# Altium PCB hud_v300.PcbDoc
Units mm, origin at the board's own origin, x right, y up, seen from the top; angles counter-clockwise.
Board outline 60 x 80 mm, 4 copper layers (Top Layer, Ground, Power, Bottom Layer), stack 1.57 mm thick; 82 components, 69 nets, 280 pads, 96 vias.
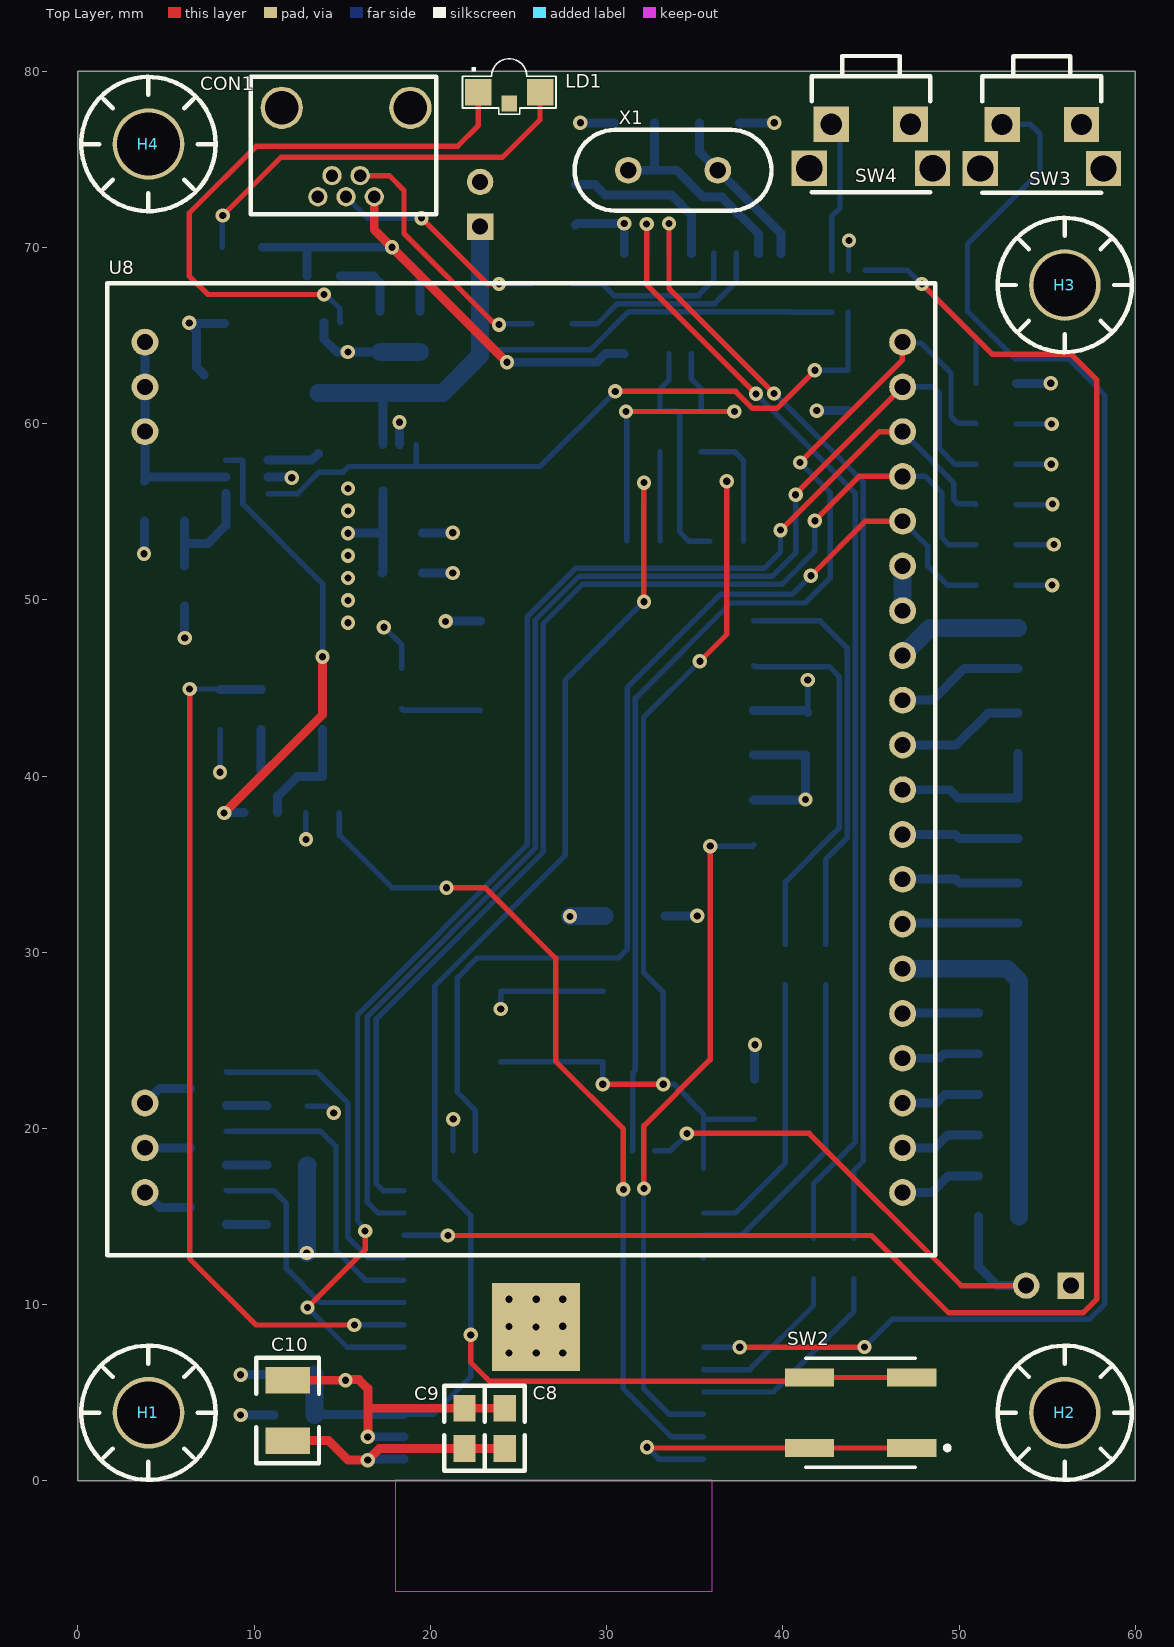
[diagram p0: Top Layer view]
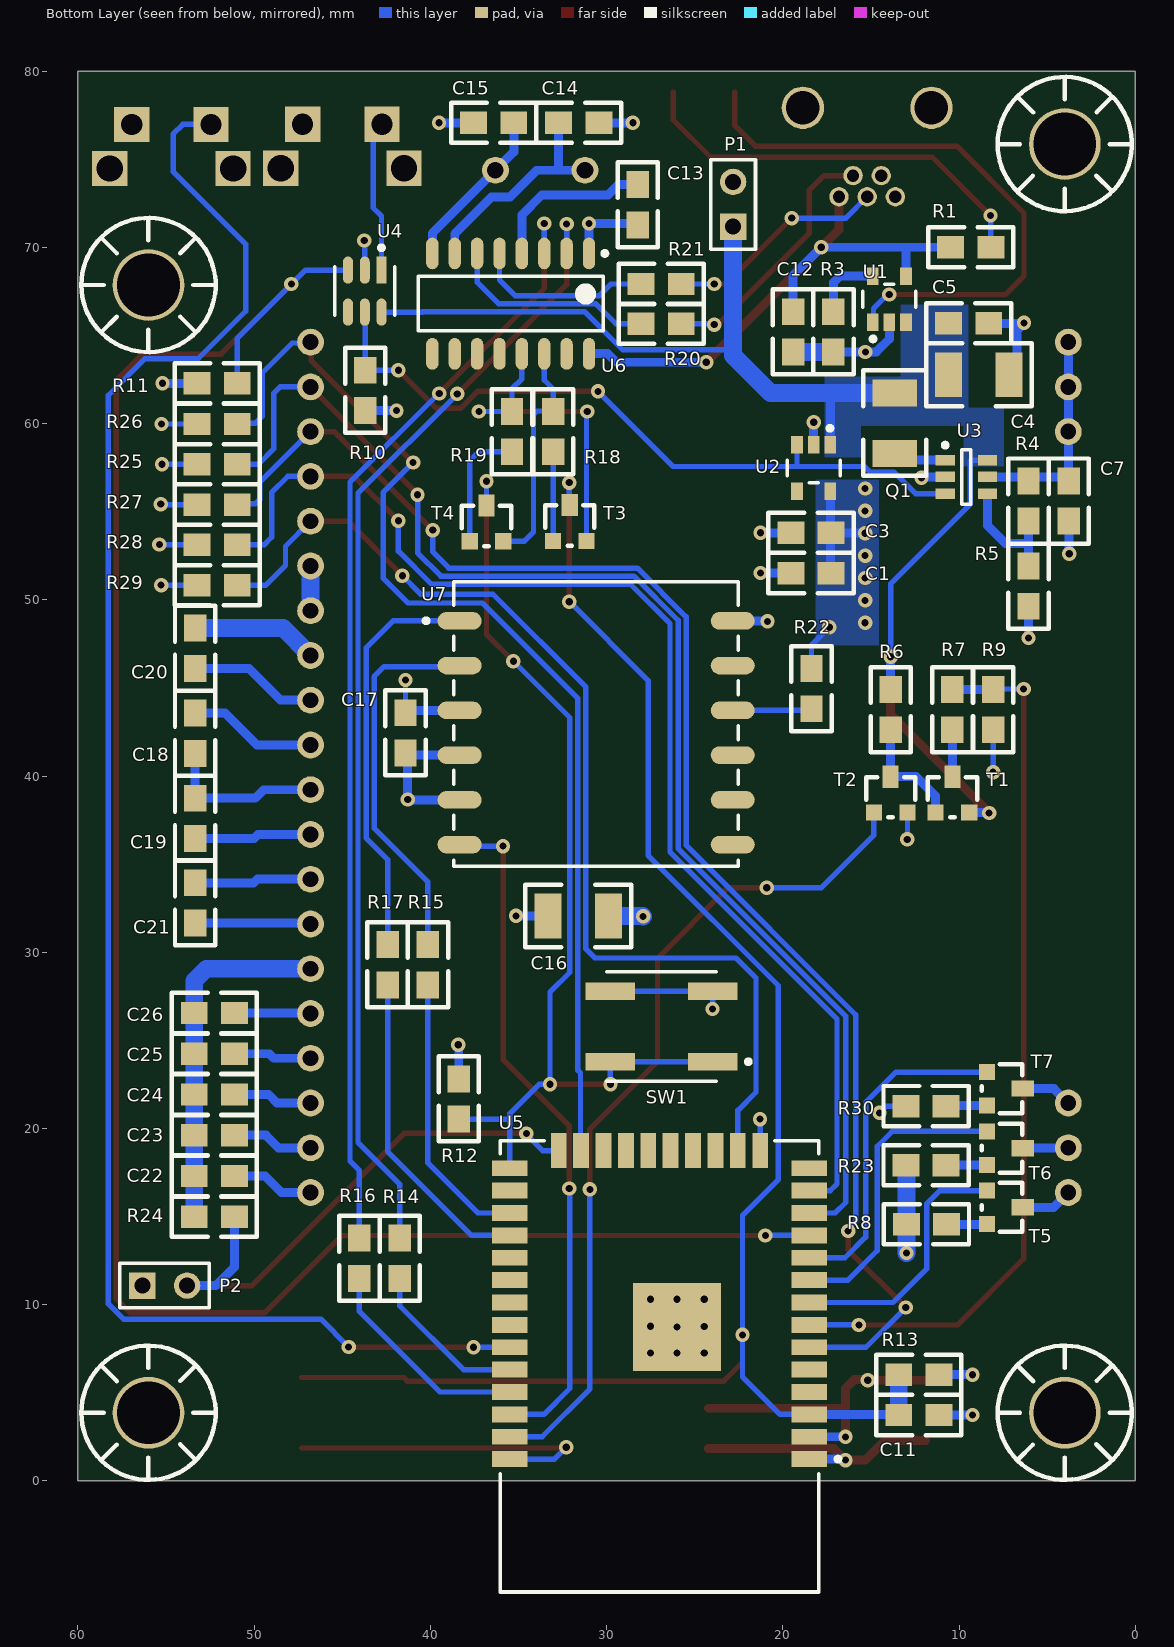
[diagram p1: Bottom Layer view, seen from below]
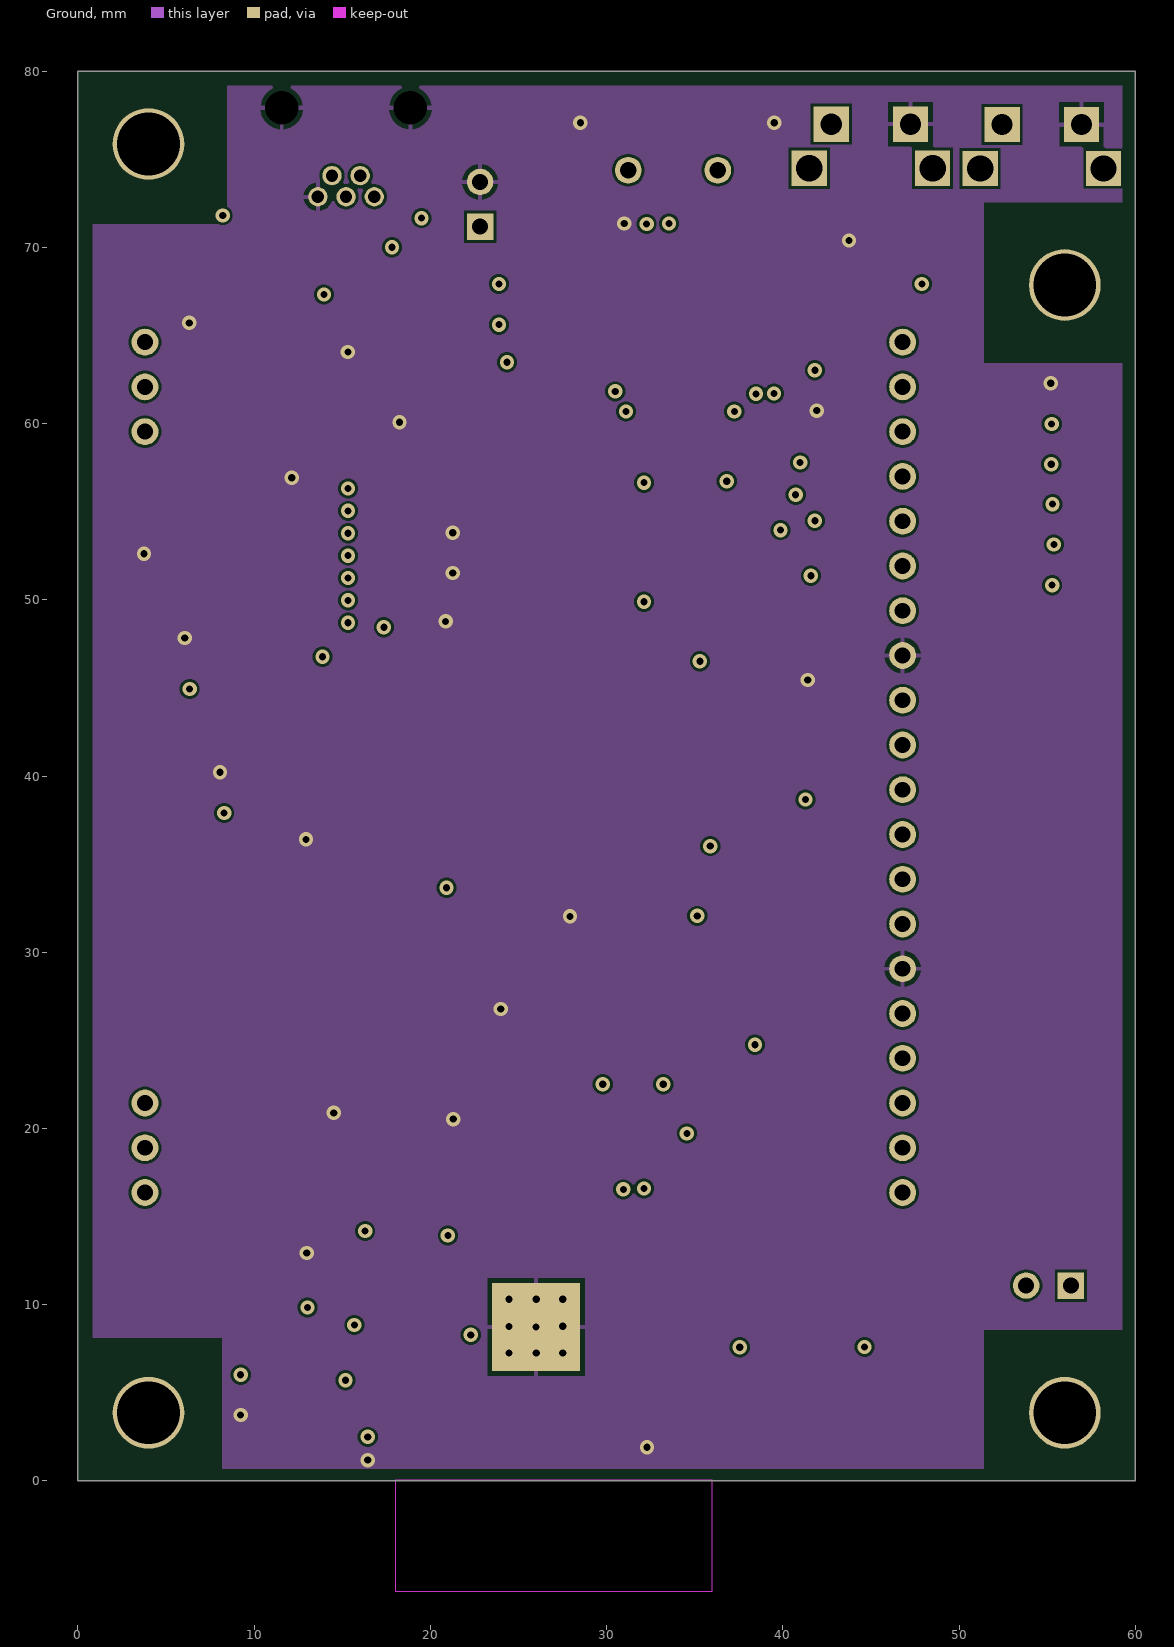
[diagram p2: Ground]
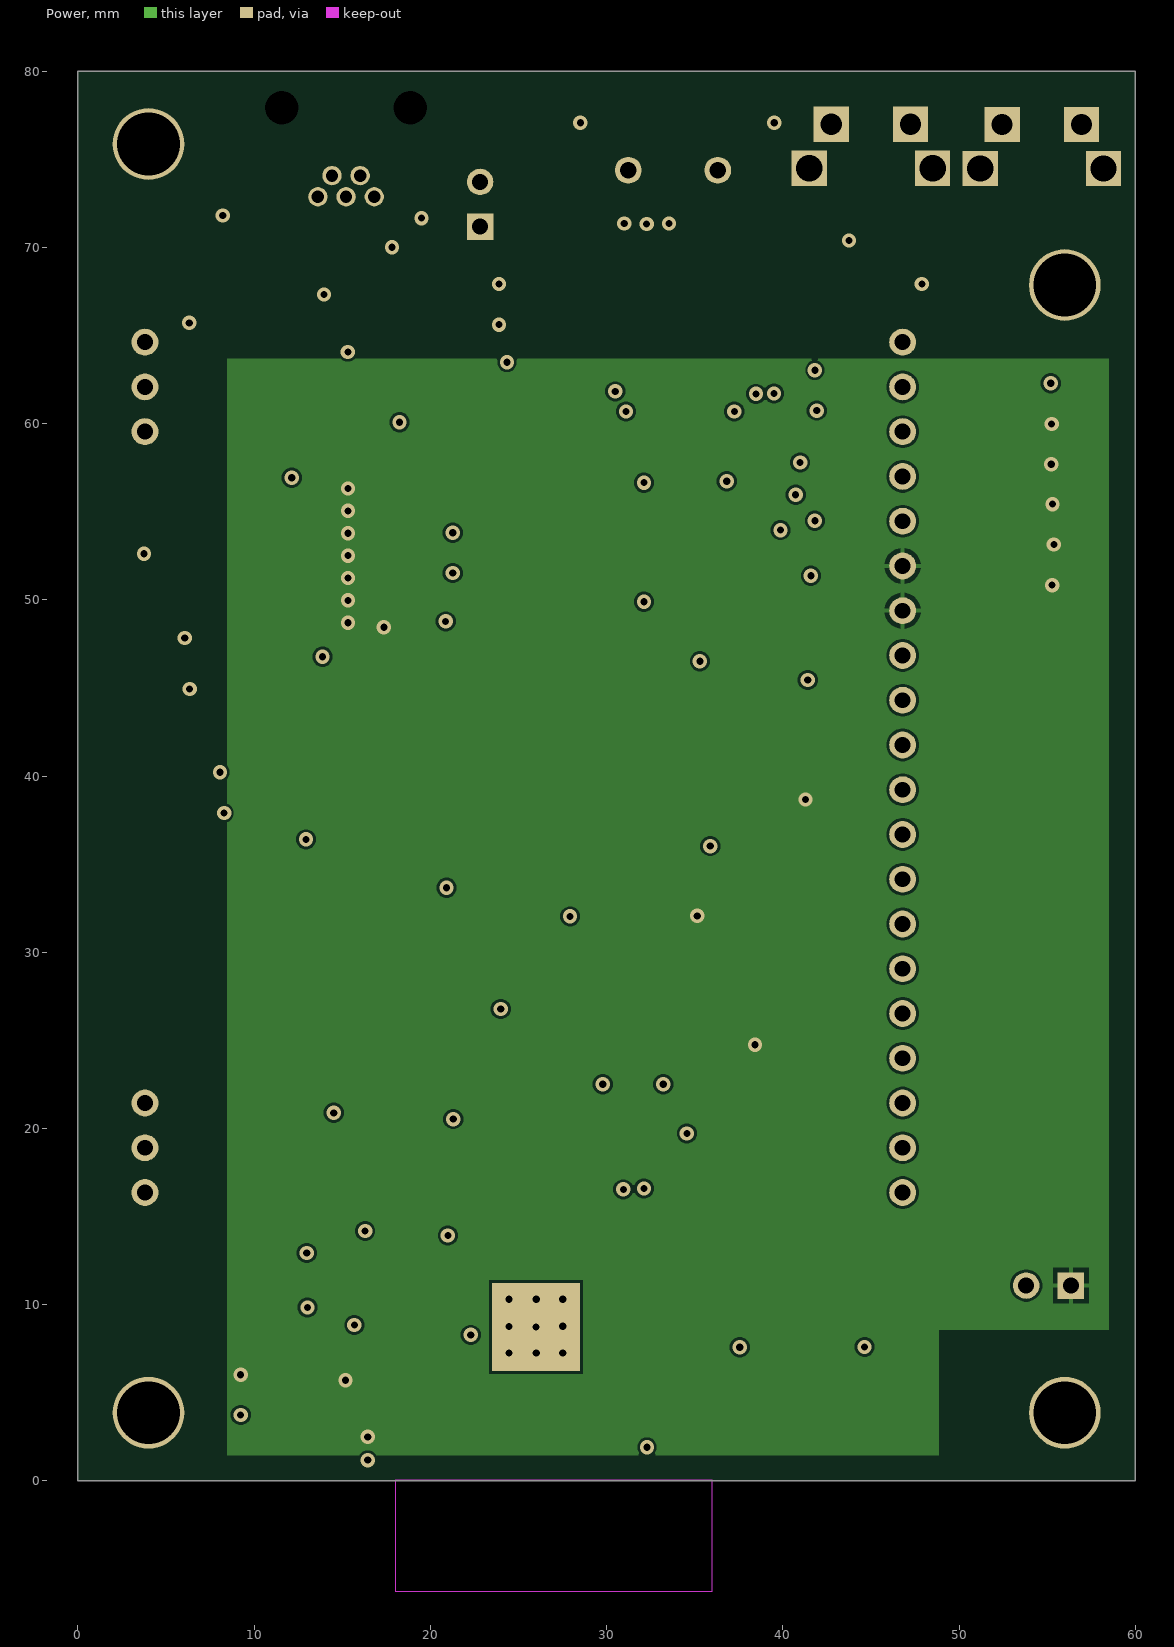
[diagram p3: Power]
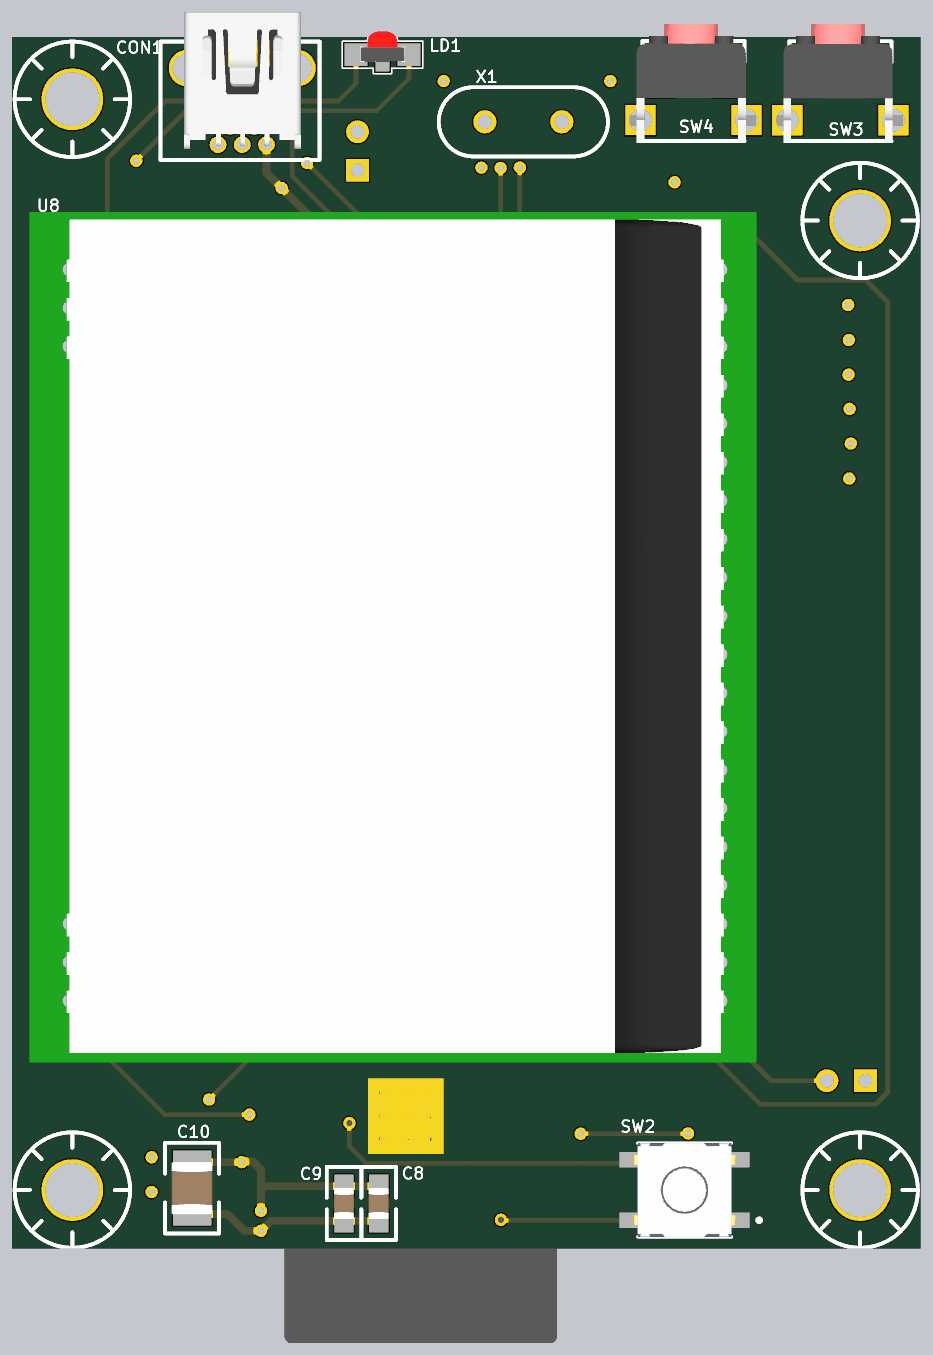
[diagram p4: 3D render of the assembled board from above, using the file's embedded part models]
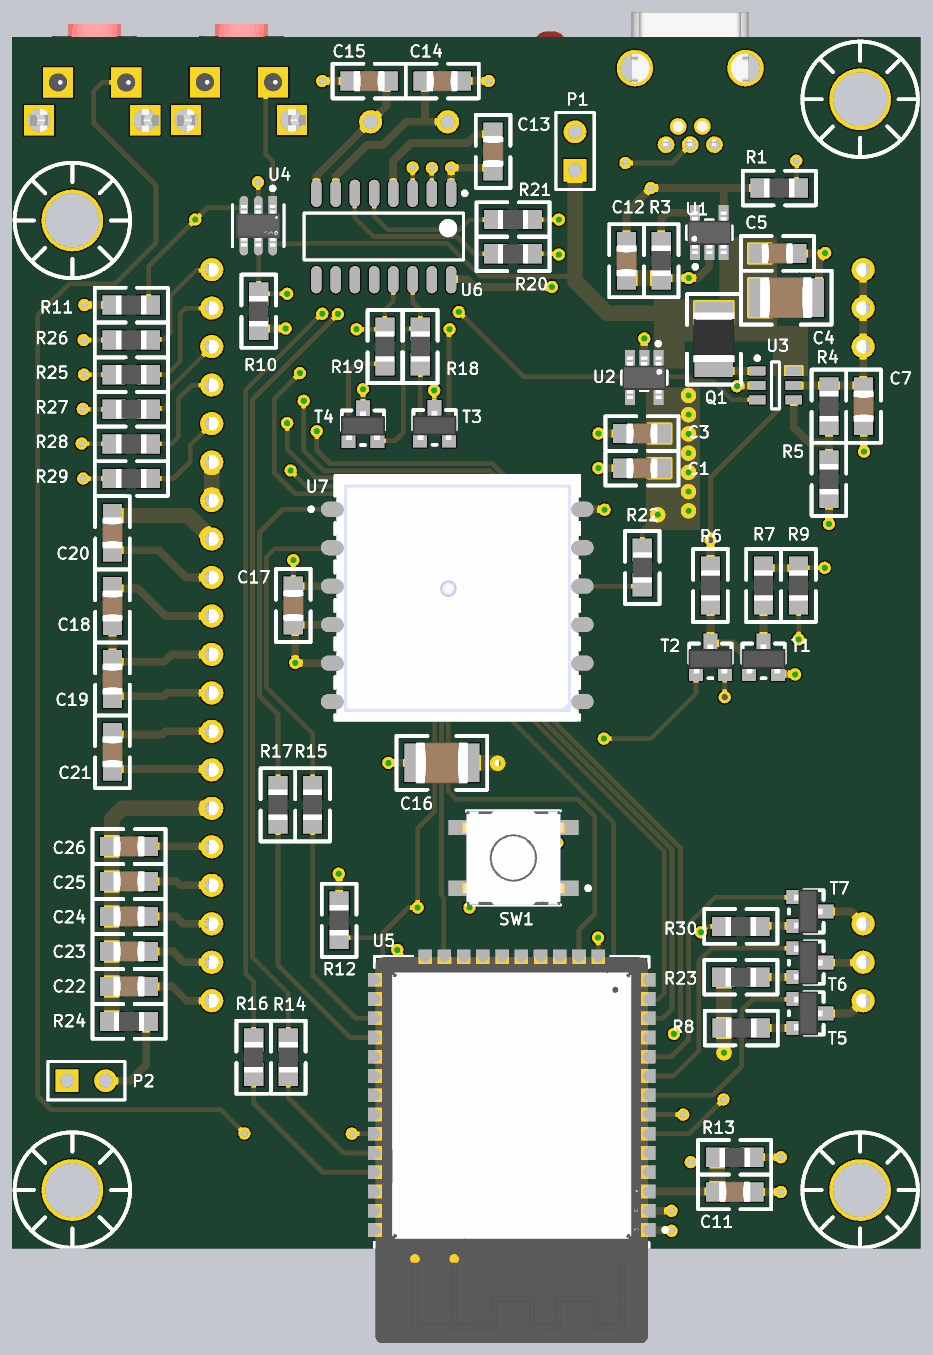
[diagram p5: 3D render of the assembled board from below, using the file's embedded part models]

## Layer stack, top to bottom
Top Solder: solder mask 0.0127, Solder Resist, Dk 3.8
Top Layer: signal copper 0.035
Dielectric 1: prepreg 0.2, 7628, Dk 4.6
Ground: signal copper 0.0175
Core: core 1.065, FR-4, Dk 4.5
Power: signal copper 0.0175
Dielectric 2: prepreg 0.2, 7628, Dk 4.6
Bottom Layer: signal copper 0.035
Bottom Solder: solder mask 0.0127, Solder Resist, Dk 3.8

## Board outline
0,0 60,0 60,80 0,80

## Design rules (kind name [scope] priority, off if disabled: settings)
Clearance [All] p1: gap=0.152 ignorepadtopadclearanceinfootprint=FALSE
PolygonConnect PolygonConnect_5 [All vs IsNamedPolygon('NONET_L02_P-001')] p1: thpad.connectstyle=Relief thpad.reliefconductorwidth=0.254 thpad.reliefentries=4 thpad.polygonreliefangle="90 Angle" thpad.airgapwidth=0.254 smdpad.connectstyle=Direct smdpad.reliefconductorwidth=0.254 smdpad.reliefentries=4 smdpad.polygonreliefangle="90 Angle" smdpad.airgapwidth=0.254 via.connectstyle=Direct via.reliefconductorwidth=0.254 via.reliefentries=4 via.polygonreliefangle="90 Angle" via.airgapwidth=0.254
PolygonConnect PolygonConnect_4 [All vs IsNamedPolygon('NONET_L02_P-001')] p2: thpad.connectstyle=Relief thpad.reliefconductorwidth=0.254 thpad.reliefentries=4 thpad.polygonreliefangle="90 Angle" thpad.airgapwidth=0.254 smdpad.connectstyle=Direct smdpad.reliefconductorwidth=0.254 smdpad.reliefentries=4 smdpad.polygonreliefangle="90 Angle" smdpad.airgapwidth=0.254 via.connectstyle=Relief via.reliefconductorwidth=0.254 via.reliefentries=4 via.polygonreliefangle="90 Angle" via.airgapwidth=0.254
PolygonConnect PolygonConnect_3 [All vs IsNamedPolygon('NONET_L02_P-001')] p3: thpad.connectstyle=Relief thpad.reliefconductorwidth=0.254 thpad.reliefentries=4 thpad.polygonreliefangle="90 Angle" thpad.airgapwidth=0.254 smdpad.connectstyle=Direct smdpad.reliefconductorwidth=0.254 smdpad.reliefentries=4 smdpad.polygonreliefangle="90 Angle" smdpad.airgapwidth=0.254 via.connectstyle=Relief via.reliefconductorwidth=0.254 via.reliefentries=4 via.polygonreliefangle="90 Angle" via.airgapwidth=0.254
PolygonConnect PolygonConnect_2 [All vs IsNamedPolygon('+VBAT_L04_P000')] p4: thpad.connectstyle=Relief thpad.reliefconductorwidth=0.254 thpad.reliefentries=4 thpad.polygonreliefangle="90 Angle" thpad.airgapwidth=0.254 smdpad.connectstyle=Direct smdpad.reliefconductorwidth=0.254 smdpad.reliefentries=4 smdpad.polygonreliefangle="90 Angle" smdpad.airgapwidth=0.254 via.connectstyle=Relief via.reliefconductorwidth=0.254 via.reliefentries=4 via.polygonreliefangle="90 Angle" via.airgapwidth=0.254
PolygonConnect PolygonConnect_1 [All vs IsNamedPolygon('+VBAT_L02_P000')] p5: thpad.connectstyle=Relief thpad.reliefconductorwidth=0.254 thpad.reliefentries=4 thpad.polygonreliefangle="90 Angle" thpad.airgapwidth=0.254 smdpad.connectstyle=Direct smdpad.reliefconductorwidth=0.254 smdpad.reliefentries=4 smdpad.polygonreliefangle="90 Angle" smdpad.airgapwidth=0.254 via.connectstyle=Relief via.reliefconductorwidth=0.254 via.reliefentries=4 via.polygonreliefangle="90 Angle" via.airgapwidth=0.254
PolygonConnect [All] p6: connectstyle=Relief reliefconductorwidth=0.254 reliefentries=4 polygonreliefangle="90 Angle" airgapwidth=0.254
RoomDefinition U_hud_v300_PWR [InComponentClass('U_hud_v300_PWR')] p1 off: confinementstyle=ConfineIn formatcopy=TRUE lockcomponents=FALSE outline 173.443,144.718 328.637,144.718 328.637,161.228 173.443,161.228
RoomDefinition hud_v300_MAIN [InComponentClass('hud_v300_MAIN')] p2 off: confinementstyle=ConfineIn formatcopy=TRUE lockcomponents=FALSE outline 173.443,14.924 209.13,14.924 209.13,25.719 173.443,25.719
RoomDefinition U_hud_v300_MU [InComponentClass('U_hud_v300_MU')] p3 off: confinementstyle=ConfineIn formatcopy=TRUE lockcomponents=FALSE outline 173.443,121.731 227.418,121.731 227.418,143.448 173.443,143.448
RoomDefinition U_hud_v300_MCU [InComponentClass('U_hud_v300_MCU')] p4 off: confinementstyle=ConfineIn formatcopy=TRUE lockcomponents=FALSE outline 173.443,90.997 287.616,90.997 287.616,120.334 173.443,120.334
RoomDefinition U_hud_v300_DISP [InComponentClass('U_hud_v300_DISP')] p5 off: confinementstyle=ConfineIn formatcopy=TRUE lockcomponents=FALSE outline 173.443,30.545 342.734,30.545 342.734,89.6 173.443,89.6
RoomDefinition U_hud_v300_CONN [InComponentClass('U_hud_v300_CONN')] p6 off: confinementstyle=ConfineIn formatcopy=TRUE lockcomponents=FALSE outline 173.443,11.749 289.648,11.749 289.648,29.275 173.443,29.275
RoutingVias [All] p1: holewidth=0.406 width=0.813 viastyle="Through Hole" minholewidth=0.406 minwidth=0.813 maxholewidth=0.406 maxwidth=0.813
SolderMaskExpansion [All] p1: expansion=0.102 istentingtop=FALSE
Width [All] p1: maxlimit=1.016 minlimit=0.254 preferedwidth=0.508 toplayer_minwidth=0.305 midlayer1_maxwidth=0.254 midlayer1_prefwidth=0.254 midlayer2_maxwidth=0.254 midlayer2_prefwidth=0.254 bottomlayer_minwidth=0.305 minimp=50.000000 maximp=50.000000 favimp=50.000000
30 further rules are at their usual default settings.

## Classes and differential pairs
component class hud_v300_MAIN: H1 H2 H3 H4
component class U_hud_v300_PWR: C1 C3 C4 C5 C7 LD1 Q1 R1 R3 R4 R5 R6 R7 R9 R10 R11 T1 T2 U1 U2 U3 U4
component class U_hud_v300_MU: C16 C17 P2 R22 R24 U7
component class U_hud_v300_MCU: C8 C9 C10 C11 R12 R13 R14 R15 R16 R17 R18 R19 SW1 SW2 T3 T4 U5
component class U_hud_v300_DISP: C18 C19 C20 C21 C22 C23 C24 C25 C26 R8 R23 R25 R26 R27 R28 R29 R30 T5 T6 T7 U8
component class U_hud_v300_CONN: C12 C13 C14 C15 CON1 P1 R20 R21 SW3 SW4 U6 X1

## Components (designator, comment, footprint, x,y, rotation, side; value= is the part's Value field where it differs from the comment)
C1 "47uF" 0805_C 18.401,51.525 r0 bottom
C3 "100nF" 0805_C 18.401,53.811 r180 bottom
C4 "10uF" 1210_C 8.876,62.905 r0 bottom
C5 "100nF" 0805_C 9.461,65.699 r0 bottom
C7 "100nF" 0805_C 3.771,55.615 r90 bottom
C8 "100nF" 0805_C 24.218,2.986 r90 top
C9 "100nF" 0805_C 21.932,2.986 r90 top
C10 "10uF" 1210_C 12.026,4.002 r90 top
C11 "100nF" 0805_C 12.28,3.748 r180 bottom
C12 "100nF" 0805_C 19.417,65.216 r90 bottom
C13 "100nF" 0805_C 28.231,72.43 r90 bottom
C14 "22pF" 0805_C 31.584,77.078 r0 bottom
C15 "22pF" 0805_C 36.41,77.078 r180 bottom
C16 "10uF" 1210_C 31.609,32.196 r0 bottom
C17 "100nF" 0805_C 41.414,42.458 r270 bottom
C18 "1uF" 0805_C 53.352,42.432 r90 bottom
C19 "1uF" 0805_C 53.352,37.606 r90 bottom
C20 "1uF" 0805_C 53.352,47.258 r270 bottom
C21 "1uF" 0805_C 53.352,32.806 r90 bottom
C22 "1uF" 0805_C 52.26,17.312 r180 bottom
C23 "1uF" 0805_C 52.26,19.623 r180 bottom
C24 "1uF" 0805_C 52.26,21.934 r180 bottom
C25 "1uF" 0805_C 52.26,24.246 r180 bottom
C26 "1uF" 0805_C 52.26,26.557 r180 bottom
CON1 "USB-MINI" USB-MINI 15.141,75.696 r180 top
H1 "HOLE" HOLE_140_160MIL 4,4 r0 top
H2 "HOLE" HOLE_140_160MIL 56,4 r0 top
H3 "HOLE" HOLE_140_160MIL 56,68 r0 top
H4 "HOLE" HOLE_140_160MIL 4,76 r0 top
LD1 "LED_RED" LED_SMD_90DEG_RED 22.722,78.82 r0 top
P1 "BATT_CONN" HDR1X2 22.821,71.185 r90 bottom
P2 "EXT_PHOTO_TRAN" HDR1X2 56.349,11.089 r180 bottom
Q1 "4.7uH" 1210 13.525,60.034 r90 bottom
R1 "330" 0805 9.334,70.017 r0 bottom
R3 "2k" 0805 17.131,65.216 r270 bottom
R4 "10k" 0805 6.057,55.615 r270 bottom
R5 "10k" 0805 6.057,50.789 r270 bottom
R6 "10k" 0805 13.88,43.778 r90 bottom
R7 "10k" 0805 10.375,43.778 r270 bottom
R8 "-" 0805 11.848,14.568 r0 bottom
R9 "3.3k" 0805 8.064,43.778 r90 bottom
R10 "100k" 0805 43.7,61.889 r90 bottom
R11 "10k" 0805 52.107,62.295 r180 bottom
R12 "10k" 0805 38.391,21.68 r90 bottom
R13 "10k" 0805 12.28,6.034 r180 bottom
R14 "510" 0805 41.744,12.638 r90 bottom
R15 "510" 0805 40.144,29.3 r270 bottom
R16 "510" 0805 44.03,12.638 r90 bottom
R17 "510" 0805 42.43,29.3 r270 bottom
R18 "10k" 0805 33.032,59.552 r90 bottom
R19 "10k" 0805 35.369,59.552 r90 bottom
R20 "22" 0805 26.91,65.673 r0 bottom
R21 "22" 0805 26.91,67.934 r0 bottom
R22 "10k" 0805 18.376,44.972 r90 bottom
R23 "-" 0805 11.874,17.921 r0 bottom
R24 "10k" 0805 52.26,15 r180 bottom
R25 "10k" 0805 52.107,57.698 r0 bottom
R26 "10k" 0805 52.107,59.984 r0 bottom
R27 "10k" 0805 52.107,55.412 r0 bottom
R28 "10k" 0805 52.107,53.126 r0 bottom
R29 "10k" 0805 52.107,50.84 r0 bottom
R30 "-" 0805 11.874,21.274 r0 bottom
SW1 "Switch_C&K_KSC241JLFS_eec" C&K_KSC241JLFS 26.885,25.795 r0 bottom
SW2 "Switch_C&K_KSC241JLFS_eec" C&K_KSC241JLFS 44.411,3.875 r180 top
SW3 "DTSA 62N" SW_DTSA-62N 54.698,74.487 r180 top
SW4 "DTSA 62N" SW_DTSA-62N 45,74.5 r180 top
T1 "BSS84" SOT23 10.375,38.8 r180 bottom
T2 "MMBF170" SOT23 13.88,38.8 r180 bottom
T3 "BC848*" SOT23 32.092,54.218 r180 bottom
T4 "BC848*" SOT23 36.816,54.192 r180 bottom
T5 "MMBF170" SOT23 7.556,15.534 r270 bottom
T6 "MMBF170" SOT23 7.556,18.886 r270 bottom
T7 "MMBF170" SOT23 7.556,22.265 r270 bottom
U1 "MCP73832T-2ATI/OT" SOT23-5 13.956,67.064 r90 bottom
U2 "RT9013-33GB" SOT23-5 18.249,57.494 r270 bottom
U3 "MCP1640T-I/CHY" SOT23-6 9.588,56.986 r180 bottom
U4 "MAX16054AZT+T" FP-Z6-1-IPC_A 43.725,67.527 r270 bottom
U5 "ESP32-WROOM-32" FP-ESP32-WROOM-32-MFG 27,6.5 r0 bottom
U6 "USB 2.0 - UART converter" SOP127P660X265-16N 35.445,66.816 r270 bottom
U7 "L80-M39" L80-M39 30.593,42.966 r180 bottom
U8 "EADOGM128S-6" EADOGM128-S 23,40.5 r270 top
X1 "12MHz" XTAL_SMALL 33.895,74.385 r180 top

## Footprints (in the part's own frame and the unit in brackets; to place one, negate y for a bottom-side part, rotate by r counter-clockwise, add the part's x,y. Pads: shape width x height; smd on the part's side, far side on the other; paste and mask are expansions set on the pad)
0805 [mil]
  rect 60x50 smd: 1(-45,0) 2(45,0)
  silkscreen extent -95,-45 95,45, body extent -39,-25 39,25, height 24
0805_C [mil] "Aluminum Electrolytic Capacitor, Body 8,30x8,30x11,00mm, IPC Low Density"
  rect 60x50 smd: 1(-45,0) 2(45,0)
  silkscreen extent -95,-45 95,45, body extent -41,-27 41,27, height 30
1210 [mil]
  rect 60x100 smd: 1(-67.5,5) 2(67.5,5)
  silkscreen extent -118,-65 118,75, body extent -60,-48 70,58, height 24
1210_C [mil]
  rect 60x100 smd: 1(-67.5,5) 2(67.5,5)
  silkscreen extent -118,-65 118,75, body extent -69,-48 69,58, height 57
C&K_KSC241JLFS [mm]
  rect 2.8x1 smd paste+0 mask+0: 1(-2.9,2) 2(2.9,2) 3(-2.9,-2) 4(2.9,-2)
  silkscreen extent -5.05,-3.1 3.1,3.1, body extent -3.4,-3.1 3.4,3.1, height 3.48
EADOGM128-S [mm]
  round 1.524 hole 0.9: 1(-24.13,-19.2) 2(-21.59,-19.2) 3(-19.05,-19.2) 18(19.05,-19.2) 19(21.59,-19.2) 20(24.13,-19.2) 21(24.13,23.8) 22(21.59,23.8) 23(19.05,23.8) 24(16.51,23.8) 25(13.97,23.8) 26(11.43,23.8) 27(8.89,23.8) 28(6.35,23.8) 29(3.81,23.8) 30(1.27,23.8) 31(-1.27,23.8) 32(-3.81,23.8) 33(-6.35,23.8) 34(-8.89,23.8) 35(-11.43,23.8) 36(-13.97,23.8) 37(-16.51,23.8) 38(-19.05,23.8) 39(-21.59,23.8) 40(-24.13,23.8)
  silkscreen extent -27.48,-21.34 27.69,25.65, body extent -27.94,-21.84 28.19,26.16, height 7.12
FP-ESP32-WROOM-32-MFG [mm]
  rect 2x0.9 smd paste+0 mask+0: 1(-8.5,5.26) 2(-8.5,3.99) 3(-8.5,2.72) 4(-8.5,1.45) 5(-8.5,0.18) 6(-8.5,-1.09) 7(-8.5,-2.36) 8(-8.5,-3.63) 9(-8.5,-4.9) 10(-8.5,-6.17) 11(-8.5,-7.44) 12(-8.5,-8.71) 13(-8.5,-9.98) 14(-8.5,-11.25) 25(8.5,-11.25) 26(8.5,-9.98) 27(8.5,-8.71) 28(8.5,-7.44) 29(8.5,-6.17) 30(8.5,-4.9) 31(8.5,-3.63) 32(8.5,-2.36) 33(8.5,-1.09) 34(8.5,0.18) 35(8.5,1.45) 36(8.5,2.72) 37(8.5,3.99) 38(8.5,5.26)
  rect 0.9x2 smd paste+0 mask+0: 15(-5.715,-12.25) 16(-4.445,-12.25) 17(-3.175,-12.25) 18(-1.905,-12.25) 19(-0.635,-12.25) 20(0.635,-12.25) 21(1.905,-12.25) 22(3.175,-12.25) 23(4.445,-12.25) 24(5.715,-12.25)
  rect 5x5 all layers, no hole paste+0 mask+0: 39(-1,-2.24)
  Keep-Out Layer region: -9,12.75 9,12.75 9,6.45 -9,6.45
  Keep-Out Layer region: -9,12.75 9,12.75 9,6.45 -9,6.45
  silkscreen extent -10.25,-12.8 9.05,12.8, body extent -9,-12.75 9,12.75, height 3.2
FP-Z6-1-IPC_A [mm]
  rect 1.54x0.566 smd paste+0 mask+0: 1(-1.191,0.95)
  rrect100% 1.54x0.566 smd paste+0 mask+0: 2(-1.191,0) 3(-1.191,-0.95) 4(1.191,-0.95) 5(1.191,0) 6(1.191,0.95)
  silkscreen extent -2.59,-1.7 1.38,1.7, body extent -1.38,-1.45 1.38,1.45, height 1.1
HDR1X2 [mm] "Connector; Header; 2 Position"
  rect 1.5x1.5 hole 0.9: 1(0,0)
  round 1.5 hole 0.9: 2(2.54,0)
  silkscreen extent -1.27,-1.27 3.81,1.27
HOLE_140_160MIL [mil]
  round 160 hole 140 unplated: 1(0,-5)
  silkscreen extent -150,-155 150,145
L80-M39 [mm]
  oval 2.5x1 smd paste+0 mask+0: 1(-7.75,5.85) 2(-7.75,3.31) 3(-7.75,0.77) 4(-7.75,-1.77) 5(-7.75,-4.31) 6(-7.75,-6.85) 7(7.75,-6.85) 8(7.75,-4.31) 9(7.75,-1.77) 10(7.75,0.77) 11(7.75,3.31) 12(7.75,5.85)
  silkscreen extent -9.77,-8.08 8.08,8.07, body extent -7.99,-8.02 8.01,7.98, height 7.01
LED_SMD_90DEG_RED [mm]
  rect 1.5x1.5 smd: A(3.5,0) K(0,0)
  rect 0.9x0.9 smd: x(1.75,-0.65)
  silkscreen extent -0.9,-1.25 4.4,1.9, body extent 0.25,-0.48 3.25,1.52, height 1.02
SOP127P660X265-16N [mm] "SOP, 16-Leads, Body 10,30x3,90mm, Pitch 1,27mm, IPC Medium Density"
  oval 1.8x0.7 smd: 1(-2.85,4.445) 2(-2.85,3.175) 3(-2.85,1.905) 4(-2.85,0.635) 5(-2.85,-0.635) 6(-2.85,-1.905) 7(-2.85,-3.175) 8(-2.85,-4.445) 9(2.85,-4.445) 10(2.85,-3.175) 11(2.85,-1.905) 12(2.85,-0.635) 13(2.85,0.635) 14(2.85,1.905) 15(2.85,3.175) 16(2.85,4.445)
  silkscreen extent -2.97,-5.25 1.55,5.47, body extent -1.95,-5.25 1.95,5.25, height 2.65
SOT23 [mil]
  rect 36x36 smd: 1(-37.5,-34) 2(37.5,-34)
  rect 36x50 smd: 3(0,46)
  silkscreen extent -55,-45 55,45, body extent -57,-42 57,52, height 44
SOT23-5 [mm]
  rect 1x0.66 smd paste+0 mask+0: 1(-1.315,0.95) 2(-1.315,0) 3(-1.315,-0.95) 4(1.315,-0.95) 5(1.315,0.95)
  silkscreen extent -2.37,-1.5 0.85,1.5, body extent -1.4,-1.45 1.4,1.45, height 1.45
SOT23-6 [mm] "SOT23, 6-Leads, Body 2.9x1.55mm, Pitch 0.95mm, IPC Medium Density"
  rect 1.1x0.6 smd: 1(-1.2,0.95) 2(-1.2,0) 3(-1.2,-0.95) 4(1.2,-0.95) 5(1.2,0) 6(1.2,0.95)
  silkscreen extent -1.33,-1.55 0.25,1.92, body extent -0.9,-1.55 0.9,1.55, height 1.45
SW_DTSA-62N [mm]
  rect 2x2 hole 1.2: 1(-2.25,-2.5) 2(2.25,-2.5)
  rect 2x2 hole 1.5: 3(3.5,0) 4(-3.5,0)
  silkscreen extent -3.37,-6.37 3.37,1.37, body extent -4.1,-6.35 4.4,1.5, height 7.2
USB-MINI [mm]
  round 1.1 hole 0.7: 1(-1.673,2.816) 2(-0.873,1.616) 3(-0.073,2.816) 4(0.727,1.616) 5(1.527,2.816)
  round 2.4 / inner round 1.524 / far side round 2.4 hole 1.9: 6(-3.723,-2.234) 7(3.577,-2.234)
  silkscreen extent -5.18,-3.99 5.33,3.82, body extent -3.94,-5.9 3.76,3.1, height 3.9
XTAL_SMALL [mil]
  round 60 hole 37: 1(-95,0) 2(105,0)
  silkscreen extent -215,-90 225,90, body extent -223,-98 223,98, height 145

## Part data
C1 C3 C4 C5 C7 C8 C9 C10 C11 C12 C13 C14 C15 C16 C17 C18 C19 C20 C21 C22 C23 C24 C25 C26: library part CAPACITOR
P1 P2: library part "Header 2", "Header, 2-Pin", LatestRevisionDate=17-Jul-2002, LatestRevisionNote="Re-released for DXP Platform.", Publisher="Altium Limited"
Q1: library part COIL
R1 R3 R4 R5 R6 R7 R8 R9 R10 R11 R12 R13 R14 R15 R16 R17 R18 R19 R20 R21 R22 R23 R24 R25 R26 R27 R28 R29 R30: library part RESISTOR, Parameter 1=10k
SW1 SW2: "SWITCH TACTILE SPST-NO 0.05A 32V", Digikey Part Number=401-1762-1-ND, Manufacturer=C&K, Mouser Part Number=611-KSC241J-LFS, Package=SMT_SW_6MM2_6MM2, Part Number=KSC241JLFS, Temperature="-40°C to +85°C", Temperature Range High=+85°C, Temperature Range Low=-40°C, ComponentLink1Description=Upverter, ComponentLink1URL=https://upverter.com/upn/revision/9eb490e79e988993/, ComponentLink2Description=Datasheet, ComponentLink2URL=http://www.ckswitches.com/media/1459/ksc.pdf, Digikey Description="SWITCH TACTILE SPST-NO 0.05A 32V", helpURL=https://upverter.com/upn/revision/9eb490e79e988993/, Lead Free=yes, RoHS=TRUE, Supplier 1=Digi-Key, Supplier 2=Mouser, Supplier Part Number 1=401-1762-1-ND, Supplier Part Number 2=611-KSC241J-LFS
SW3 SW4: library part "SW_DTSA 62N"
T1: "P-Chanel MOSFET"
T2 T5 T6 T7: "N MOSFET"
T3 T4: library part TRANSISTOR_NPN
U1: "Miniature Single-Cell, Fully Integrated Li-Ion, Li-Polymer Charge Management Controller, 4.2V, 5-Pin SOT-23, Industrial Temperature, Tape and Reel"
U2: "500mA, Low Dropout, Low Noise Ultra-Fast Without / Bypass Capacitor CMOS LDO Regulator"
U3: "Start-up Synchronous Boost Regulator with True Output Disconnect or Input / Output Bypass Option, 350 mA, Input Voltage 0.65 to 5.5 V, Output Voltage 2.0 to 5.5 V, -40 to 85 degC, 6-pin SOT-23 (CHY6), Tape and Reel"
U4: library part CMP-0251-00627-2, "IC INTFACE SPECIALIZED TSOT23-6", Case/Package=SOT-23-6, Max Operating Temperature=125°C, Max Power Dissipation=727W, Max Supply Voltage=5.5V, Min Operating Temperature=-40°C, Min Supply Voltage=2.7V, Number of Voltages Monitored=1, Operating Supply Current=7uA, Undervoltage Threshold=1.8V, Contact Plating=Tin, Height=0.73mm, Length=4mm, Mount="Surface Mount", Number of Pins=6, Output Type=PUSH-PULL, Package Quantity=1, Packaging="Tape and Reel", Radiation Hardening=No, RoHS Compliant=Yes, Series=-, Watchdog Timer=No, Width=4mm
U5: "IC RF TXRX+MCU BLUETOOTH 48VFQFN"
U6: library part CH340G, "Full-speed USB interface, compatible with USB 2.0 interface / Operates with a minimum amount of external components: a crystal and a minimum of four capacitors"
U7: "QUECTEL GPS MODULE"
U8: "128x64 LCD Module with custom RGB Backlight"
X1: library part XTAL
LD1: Type (0°)=LTSTC170CKT, Type (90°)=HSMS-C110

## Via types
v1: diameter 0.813, hole 0.406, Top Layer to Bottom Layer, 87 vias
v2: diameter 0.7/0.813/0.813/0.7 (per signal layer), hole 0.406, Top Layer to Bottom Layer, 9 vias

## Nets (pads, with @x,y where several pads share a name; then routed paths per layer and width w, separated by ;. In a path a pad name is that pad's centre, name@x,y a point inside that pad or via, vN(x,y) a via of type N, cw(c..) or ccw(c..) an arc to the next point about the centre after c; other vN are vias at no path point)
1PPS: U5.36 U7.6 | length 38.9
  Top Layer w0.305: v1(32.117,16.6) 32.117,20.156 35.877,23.916 v1(35.877,36.031)
  Bottom Layer w0.305: v1(32.117,16.6) 32.092,16.575 32.092,5.247 33.559,3.78 U5.36 ; v1(35.877,36.031) 38.259,36.031 U7.6
3.3V: C1.1 C3.2 C8.2 C9.2 C10.2 C16.2 C17.2 P2.1 R12.2 R13.2 R22.2 R25.2 R26.2 R27.2 R28.2 R29.2 U2.5 U5.2 U7.4 U7.5 U8.34 U8.35 | length 53.7
  Top Layer w0.508: C10.2 v1(15.182,5.717) 15.219,5.754 15.938,5.754 16.446,5.247 16.446,4.205 ; v1(16.446,2.503) 16.446,4.205 ; C8.2 C9.2 16.522,4.129 16.446,4.205
  Power w0.254: v1@41.269,38.656 v1(41.287,38.673)
  Bottom Layer w0.305: v1(17.36,48.452) 18.376,47.436 R22.2 ; R29.2 v1(55.282,50.84) ; R28.2 55.358,53.126 v1(55.384,53.151) ; R27.2 55.282,55.412 v1(55.308,55.437) ; R25.2 v1(55.231,57.698) ; R26.2 v1(55.257,59.984)
  Bottom Layer w0.508: v1(9.232,6.034) R13.2 ; v1(15.328,53.786) 15.353,53.811 C3.2 ; v1(16.446,2.503) 16.452,2.51 U5.2 ; C1.1 17.299,51.566 U2.5 ; C16.2 v1(35.14,32.069) ; U7.4@38.326,41.213 U7.4 41.295,41.196 41.295,38.681 v1(41.287,38.673) ; U7.5 v1@41.295,38.656 ; R12.2 38.391,24.728 v1(38.417,24.754)
  Bottom Layer w1.016: U8.34 U8.35
  other v1: 15.328,48.706 15.328,49.976 15.328,51.246 15.328,52.516 15.328,55.056 15.328,56.326
5V: C7.2 R4.1 U3.5 U8.1 U8.2 U8.3 | length 12.3
  Bottom Layer w0.508: C7.2 3.8,56.787 U8.3 U8.2 U8.1 ; C7.2@4,56.986 U3.5
+VBAT: C4.2 C5.2 P1.1 Q1.2 R6.2 T1.2 U1.3 U2.1 U3.6 U4.6 | length 69.5
  Top Layer w0.508: v1(8.292,37.911) 13.88,43.499 v1(13.88,46.776)
  Bottom Layer w0.305: U3.6 9.298,57.936 9.359,57.875 9.359,55.437 13.88,50.916 v1(13.88,46.776) ; 22.821,63.87 23.151,64.2 29.095,64.2 31.254,66.359 40.449,66.359 40.471,66.337 U4.6
  Bottom Layer w0.508: v1(8.292,37.911) 8.318,37.936 T1.2 ; R6.2 v1(13.88,46.776) ; U2.1 17.299,61.688 17.36,61.749
  Bottom Layer w1.016: Q1.2 17.36,61.749 20.7,61.749 22.821,63.87 P1.1
+VUSB: C12.2 CON1.1 R1.2 U1.4 U6.16 | length 32.7
  Top Layer w0.508: CON1.1 16.814,71.02 v1(17.817,70.017) v1(24.345,63.489)
  Bottom Layer w0.508: R1.2 13.093,70.017 ; U1.4 13.006,69.93 13.093,70.017 ; C12.2 19.417,68.416 v1(17.817,70.017) 13.093,70.017 ; v1(24.345,63.489) 29.45,63.489 29.958,63.997 30.969,63.997 U6.16
BLUE_DIMM: T5.3 U8.20 | length 2.9
  Bottom Layer w0.508: U8.20 4.636,15.534 T5.3
EN: C11.1 R13.1 SW2.3 SW2.4 T3.3 U5.3 | length 96.9
  Top Layer w0.305: v1(22.288,8.291) 22.288,6.739 23.195,5.832 23.374,5.653 41.289,5.653 SW2.4 SW2.3 ; v1(32.117,49.9) v1(32.117,56.656)
  Bottom Layer w0.305: U5.3 20.161,3.78 22.288,5.907 v1(22.288,8.291) 22.288,15.076 20.256,17.108 20.256,28.107 27.647,35.498 27.647,45.429 v1(32.117,49.9) ; T3.3 32.117,55.412 v1(32.117,56.656)
  Bottom Layer w0.508: C11.1 13.455,3.78 U5.3
  Bottom Layer w1.016: C11.1 R13.1
GND: C1.2 C3.1 C4.1 C5.1 C7.1 C8.1 C9.1 C10.1 C11.2 C12.1 C13.1 C14.1 C15.1 C16.1 C17.1 C20.1 C22.1 C23.1 C24.1 C25.1 C26.1 CON1.5 CON1.6 CON1.7 P1.2 R3.2 R5.2 R8.2 R9.1 R10.1 R11.1 R23.2 R24.1 R30.2 SW1.3 SW1.4 SW2.1 SW2.2 SW3.1 SW4.1 T2.2 U1.2 U2.2 U3.2 U4.2 U5.1 U5.15 U5.38 U5.39 U6.1 U7.3 U7.12 U8.26 U8.33 | length 126.8
  Top Layer w0.305: v1(32.292,1.911) 32.328,1.875 SW2.2 SW2.1
  Top Layer w0.508: C10.1 14.223,2.288 15.328,1.183 v1(16.446,1.183) 17.106,1.843 C9.1 C8.1
  Bottom Layer w0.305: v1(8.064,40.222) R9.1 ; T2.2 12.928,36.425 v1(12.94,36.412) ; R30.2 14.102,21.274 14.483,20.893 v1(14.515,20.893) ; U5.15 21.285,20.525 v1(21.297,20.537) ; v1(23.989,26.786) 23.985,26.79 SW1.3 SW1.4 ; v1(32.292,1.911) 32.963,1.24 U5.38 ; C17.1 v1(41.414,45.455) ; U4.2 43.725,70.372 v1(43.751,70.398)
  Bottom Layer w0.508: v1(3.746,52.618) 3.771,52.643 C7.1 ; v1(6.057,47.842) R5.2 ; C4.1 6.717,63.222 6.717,65.274 6.311,65.68 v1(6.311,65.724) 6.336,65.699 C5.1 ; v1(9.232,3.748) C11.2 ; U3.2 12.077,56.986 v1(12.128,56.936) ; U1.2 13.956,64.81 14.693,64.073 v1(15.316,64.073) R3.2 ; v1(16.446,1.183) 16.503,1.24 U5.1 ; U2.2 v1(18.249,60.085) ; C1.2 v1(21.272,51.525) ; C3.1 v1(21.272,53.811) ; v1(20.865,48.782) 20.899,48.816 U7.12 ; C13.1 28.307,71.363 v1(31,71.363) U6.1 ; v1(28.511,77.078) C14.1 ; C15.1 v1(39.509,77.078) ; U7.3 41.279,43.736 C17.1 ; v1(41.922,60.746) R10.1 ; R11.1 v1(55.206,62.295)
  Bottom Layer w1.016: v1(12.983,12.939) 12.991,12.947 R8.2 12.991,17.896 R23.2 ; R3.2 C12.1 ; v1(27.926,32.044) 27.952,32.069 C16.1 ; U8.26 52.719,29.07 53.403,28.386 C26.1 C25.1 C24.1 C23.1 C22.1 R24.1 ; U8.33 48.351,48.401 C20.1
  other v2: 24.46,7.262 26.009,7.262 27.508,7.262 24.46,8.761 26,8.74 27.508,8.786 24.46,10.31 26.009,10.31 27.508,10.31
GPS_RST: R22.1 U7.10 | length 4.5
  Bottom Layer w0.305: R22.1 18.47,43.736 U7.10
GPS_RX: R17.1 U7.1 | length 23.3
  Bottom Layer w0.305: U7.1 42.117,48.816 43.649,47.284 43.649,36.489 42.43,35.269 R17.1
GPS_TX: R15.1 U7.2 | length 21.6
  Bottom Layer w0.305: U7.2 38.402,46.217 42.633,46.217 43.192,45.658 43.192,37.047 40.144,33.999 R15.1
GREEN_DIMM: T6.3 U8.19 | length 2.6
  Bottom Layer w0.508: U8.19 3.824,18.886 T6.3
IO0: R12.1 SW1.1 SW1.2 T4.3 U5.25 | length 57.5
  Top Layer w0.305: v1(29.781,22.519) v1(33.21,22.519) ; v1(35.292,46.522) 36.816,48.046 v1(36.816,56.732)
  Bottom Layer w0.305: SW1.1 SW1.2 29.785,22.523 v1(29.781,22.519) ; v1(35.292,46.522) 32.092,43.321 32.092,28.869 33.21,27.751 v1(33.21,22.519) v1(33.21,22.519) 33.82,22.518 35.5,20.838 35.5,20.563 ; U5.25 35.5,20.563 ; T4.3 v1(36.816,56.732) ; R12.1 35.525,20.537 35.5,20.563
LDO_EN: R10.2 U2.3 U3.3 U4.5 | length 41.2
  Top Layer w0.305: v1(30.492,61.838) 37.324,61.838 38.29,60.873 39.661,60.873 v1(41.82,63.032)
  Bottom Layer w0.305: U3.3 12.473,56.036 13.69,57.253 15.048,57.253 15.365,57.571 19.214,57.571 ; U2.3 19.199,57.586 19.214,57.571 ; v1(30.492,61.838) 26.225,57.571 19.214,57.571 ; v1(41.82,63.032) R10.2 43.7,66.312 U4.5
NetC13_2: C13.2 U6.4 | length 9.5
  Bottom Layer w0.508: C13.2 28.238,73.565 29.331,73.565 29.908,72.988 33.667,72.988 34.81,71.845 U6.4
NetC14_2: C14.2 U6.7 X1.2 | length 12.7
  Bottom Layer w0.508: X1.2 32.676,74.385 ; C14.2 32.727,74.436 32.676,74.385 ; U6.7 38.62,70.779 36.537,72.861 35.496,72.861 33.972,74.385 32.676,74.385
NetC15_2: C15.2 U6.8 X1.1 | length 9.3
  Bottom Layer w0.508: C15.2 35.267,75.427 X1.1 39.89,70.804 U6.8
NetC18_1: C18.1 C19.2 U8.30 | length 9.3
  Bottom Layer w0.508: U8.30 49.467,39.23 49.948,38.749 C19.2 C18.1
NetC18_2: C18.2 U8.31 | length 7.3
  Bottom Layer w0.508: U8.31 49.845,41.77 51.65,43.575 C18.2
NetC19_1: C19.1 U8.29 | length 6.6
  Bottom Layer w0.508: U8.29 49.772,36.69 49.999,36.463 C19.1
NetC20_2: C20.2 U8.32 | length 7.3
  Bottom Layer w0.508: U8.32 48.499,44.31 50.304,46.115 C20.2
NetC21_1: C21.1 U8.27 | length 6.6
  Bottom Layer w0.508: U8.27 46.853,31.663 C21.1
NetC21_2: C21.2 U8.28 | length 6.6
  Bottom Layer w0.508: U8.28 46.802,34.152 49.821,34.152 50.024,33.949 C21.2
NetC22_2: C22.2 U8.21 | length 4.7
  Bottom Layer w0.508: U8.21 48.448,16.37 49.389,17.312 C22.2
NetC23_2: C23.2 U8.22 | length 4.6
  Bottom Layer w0.508: U8.22 48.626,18.91 49.339,19.623 C23.2
NetC24_2: C24.2 U8.23 | length 4.5
  Bottom Layer w0.508: U8.23 48.702,21.45 49.186,21.934 C24.2
NetC25_2: C25.2 U8.24 | length 4.4
  Bottom Layer w0.508: U8.24 48.88,23.99 49.135,24.246 C25.2
NetC26_2: C26.2 U8.25 | length 4.3
  Bottom Layer w0.508: U8.25 46.827,26.557 C26.2
NetCON1_2: CON1.2 R20.1 | length 14.7
  Top Layer w0.305: CON1.2 17.665,74.081 18.503,73.242 18.503,70.804 23.48,65.827 23.546,65.827 23.75,65.622 v1(23.888,65.622)
  Bottom Layer w0.305: v1(23.888,65.622) 23.939,65.673 R20.1
NetCON1_3: CON1.3 R21.1 | length 12.6
  Top Layer w0.305: v1(19.494,71.668) 23.227,67.934 v1(23.888,67.934)
  Bottom Layer w0.305: CON1.3 16.427,71.668 v1(19.494,71.668) ; v1(23.888,67.934) R21.1
NetLD1_A: LD1.A R1.1 | length 23.6
  Top Layer w0.305: v1(8.216,71.82) 11.518,75.122 24.091,75.122 26.222,77.253 LD1.A
  Bottom Layer w0.305: R1.1 8.191,71.795 v1(8.216,71.82)
NetLD1_K: LD1.K U1.1 | length 34
  Top Layer w0.305: v1(13.956,67.333) 7.369,67.333 6.311,68.391 6.311,71.947 10.121,75.757 21.551,75.757 22.722,76.928 LD1.K
  Bottom Layer w0.305: v1(13.956,67.333) 14.051,67.333 14.856,66.528 14.856,65.8 U1.1
NetP2_2: P2.2 R24.2 U5.24 | length 31.1
  Top Layer w0.305: v1(34.556,19.725) 41.49,19.725 50.126,11.089 P2.2
  Bottom Layer w0.305: U5.24 33.632,18.75 34.556,19.674 v1(34.556,19.725)
  Bottom Layer w0.508: R24.2 51.117,12.155 52.183,11.089 P2.2
NetQ1_1: Q1.1 U3.1 | length 3
  Bottom Layer w0.508: U3.1 13.268,57.936 Q1.1
NetR3_1: R3.1 U1.5 | length 4
  Bottom Layer w0.508: U1.5 16.762,68.379 17.131,68.01 R3.1
NetR4_2: R4.2 R5.1 U3.4 | length 7.1
  Bottom Layer w0.508: R5.1 6.057,53.202 ; R4.2 6.057,53.202 ; U3.4 8.388,54.237 7.352,53.202 6.057,53.202
NetR6_1: R6.1 T1.1 T2.3 | length 6.6
  Bottom Layer w0.508: T1.1 11.327,38.864 12.432,39.968 T2.3 R6.1
NetR7_1: R7.1 R9.2 U5.7 | length 50.1
  Top Layer w0.305: v1(6.336,44.947) 6.336,12.613 10.096,8.853 v1(15.684,8.853)
  Bottom Layer w0.305: v1(6.336,44.947) 8.038,44.947 R9.2 ; v1(15.684,8.853) 15.69,8.86 U5.7
  Bottom Layer w0.508: R9.2 R7.1
NetR7_2: R7.2 T1.3 | length 2.7
  Bottom Layer w0.508: T1.3 R7.2
NetR8_1: R8.1 T5.2 | length 2.3
  Bottom Layer w0.508: T5.2 8.432,14.568 R8.1
NetR11_2: R11.2 U4.3 U5.11 | length 116.2
  Top Layer w0.305: v1(20.992,13.933) 45.021,13.933 49.415,9.539 57.035,9.539 57.822,10.327 57.822,62.473 56.349,63.946 51.879,63.946 v1(47.891,67.934)
  Bottom Layer w0.305: U5.11 20.986,13.94 v1(20.992,13.933) ; U4.3 47.081,68.718 50.964,64.835 R11.2
NetR14_1: R14.1 U5.34 | length 9.3
  Bottom Layer w0.305: U5.34 38.118,6.32 41.744,9.946 R14.1
NetR14_2: R14.2 U6.2 | length 65.1
  Top Layer w0.305: v1(32.27,71.337) 32.27,67.898 35.408,64.76 v1(38.475,61.693)
  Bottom Layer w0.305: U6.2 v1(32.27,71.337) ; v1(38.475,61.693) 44.106,56.062 44.106,19.217 41.744,16.854 R14.2
NetR15_2: R15.2 U5.27 | length 15.9
  Bottom Layer w0.305: U5.27 37.306,15.21 40.144,18.048 R15.2
NetR16_1: R16.1 U5.35 | length 12.3
  Bottom Layer w0.305: U5.35 39.465,5.05 44.03,9.615 R16.1
NetR16_2: R16.2 U6.3 | length 64.1
  Top Layer w0.305: v1(33.54,71.363) 33.54,67.68 v1(39.501,61.718)
  Bottom Layer w0.305: U6.3 v1(33.54,71.363) ; v1(39.501,61.718) 39.527,61.718 44.563,56.682 44.563,18.15 44.03,17.616 R16.2
NetR17_2: R17.2 U5.28 | length 18.4
  Bottom Layer w0.305: U5.28 37.661,13.94 42.43,18.709 R17.2
NetR18_1: R18.1 T3.1 | length 5.1
  Bottom Layer w0.305: R18.1 33.032,53.367 T3.1
NetR18_2: R18.2 T4.2 U6.14 | length 13.3
  Bottom Layer w0.305: U6.14 33.54,62.473 33.032,61.965 R18.2 33.057,60.72 33.946,60.72 34.149,60.517 34.149,53.862 34.683,53.329 T4.2
NetR19_1: R19.1 T4.1 | length 7.2
  Bottom Layer w0.305: R19.1 37.274,58.409 37.769,57.914 T4.1
NetR19_2: R19.2 T3.2 U6.13 | length 18.9
  Top Layer w0.305: v1(31.101,60.695) v1(37.248,60.695)
  Bottom Layer w0.305: v1(31.101,60.695) 31.139,60.657 T3.2 ; U6.13 34.81,62.549 35.369,61.99 R19.2 v1(37.248,60.695)
NetR20_2: R20.2 U6.6 | length 11.9
  Bottom Layer w0.305: R20.2 29.476,65.673 30.619,66.816 36.131,66.816 37.35,68.035 U6.6
NetR21_2: R21.2 U6.5 | length 10.2
  Bottom Layer w0.305: R21.2 29.755,67.934 30.416,67.273 35.191,67.273 36.08,68.162 U6.5
NetR23_1: R23.1 T6.2 | length 2.3
  Bottom Layer w0.508: T6.2 10.718,17.934 R23.1
NetR25_1: R25.1 U5.12 U8.39 | length 75.4
  Top Layer w0.305: v1(40.728,55.97) 40.728,56.018 U8.39
  Bottom Layer w0.305: U5.12 17.03,15.21 16.42,15.82 16.42,26.368 25.945,35.893 25.945,48.847 28.446,51.348 39.407,51.348 40.728,52.668 v1(40.728,55.97) ; U8.39 48.528,62.09 48.881,61.736 48.881,58.587 49.77,57.698 R25.1
NetR26_1: R26.1 U5.23 U8.40 | length 63.7
  Top Layer w0.305: v1(40.982,57.799) 46.772,63.589 46.772,64.602 U8.40
  Bottom Layer w0.305: U5.23 31.482,18.787 31.482,23.162 31.635,23.314 31.635,44.413 37.045,49.824 41.261,49.824 42.684,51.246 42.684,56.097 v1(40.982,57.799) ; U8.40 46.85,64.58 47.841,64.58 49.542,62.879 49.542,60.415 49.924,60.034 50.914,60.034 R26.1
  Bottom Layer w0.508: U8.40 U8.40@46.802,64.632
NetR27_1: R27.1 U5.6 U8.38 | length 84
  Top Layer w0.305: v1(13.022,9.849) 16.293,13.121 v1(16.293,14.187) ; v1(39.864,53.964) 39.89,53.964 45.476,59.55 U8.38
  Bottom Layer w0.305: v1(13.022,9.849) 15.281,7.59 U5.6 ; v1(16.293,14.187) 16.293,14.315 15.861,14.747 15.861,26.456 25.488,36.082 25.488,49.036 28.257,51.805 38.95,51.805 39.864,52.719 v1(39.864,53.964) ; U8.38 49.694,56.656 49.694,55.691 49.924,55.462 50.914,55.462 R27.1
NetR28_1: R28.1 U5.13 U8.37 | length 69.6
  Top Layer w0.305: v1(41.82,54.497) 44.333,57.01 U8.37
  Bottom Layer w0.305: U5.13 17.309,16.48 16.928,16.861 16.928,26.229 26.402,35.703 26.402,48.657 28.635,50.89 39.941,50.89 41.82,52.77 v1(41.82,54.497) ; U8.37 48.096,57.01 49.008,56.097 49.008,53.557 49.44,53.126 R28.1
NetR29_1: R29.1 U5.16 U8.36 | length 61.2
  Top Layer w0.305: v1(41.592,51.373) 44.689,54.47 U8.36
  Bottom Layer w0.305: U5.16 22.555,21.032 21.526,22.061 21.526,28.551 22.656,29.681 30.67,29.681 31.178,30.189 31.178,45.048 36.461,50.332 40.55,50.332 v1(41.592,51.373) ; U8.36 48.221,53.049 48.221,51.957 49.339,50.84 R29.1
NetR30_1: R30.1 T7.2 | length 2.3
  Bottom Layer w0.508: T7.2 10.692,21.312 R30.1
NetT2_1: T2.1 U5.37 | length 48.2
  Top Layer w0.305: v1(20.916,33.669) 23.1,33.669 27.114,29.656 27.114,23.814 30.949,19.979 v1(30.949,16.55)
  Bottom Layer w0.305: T2.1 14.833,36.649 17.812,33.669 v1(20.916,33.669) ; v1(30.949,16.55) 30.949,5.221 33.66,2.51 U5.37
NetT5_1: T5.1 U5.8 | length 14.9
  Bottom Layer w0.305: T5.1 8.432,16.473 11.086,16.473 11.823,15.737 11.823,12.054 13.747,10.13 U5.8
NetT6_1: T6.1 U5.9 | length 17.1
  Bottom Layer w0.305: T6.1@8.432,19.852 T6.1 13.791,19.839 14.642,18.988 14.642,13.07 16.312,11.4 U5.9
NetT7_1: T7.1 U5.10 | length 18.9
  Bottom Layer w0.305: T7.1 8.432,23.204 13.575,23.204 15.303,21.477 15.303,13.843 16.476,12.67 U5.10
NetU5_14: U5.14
NetU5_29: U5.29 | length 0
  Bottom Layer w0.305: U5.29@35.468,12.638 U5.29
ON_OFF: SW4.2 U4.1 | length 8.7
  Bottom Layer w0.305: SW4.2 43.243,76.507 43.243,72.252 42.775,71.784 U4.1
RED_DIMM: T7.3 U8.18 | length 2.9
  Bottom Layer w0.508: U8.18 4.615,22.265 T7.3
START: SW3.2 U5.33 | length 99.3
  Top Layer w0.305: v1(37.553,7.59) 44.621,7.59 v1(44.64,7.609)
  Bottom Layer w0.305: U5.33 v1(37.553,7.59) ; v1(44.64,7.609) 46.214,9.184 57.416,9.184 58.279,10.047 58.279,61.618 56.206,63.692 53.174,63.692 50.482,66.384 50.482,70.194 54.596,74.309 54.596,76.443 54.052,76.987 SW3.2
pads on no net: CON1.4 H1.1 H2.1 H3.1 H4.1 LD1.x SW3.3 SW3.4 SW4.3 SW4.4 U2.4 U4.4 U5.4 U5.5 U5.17 U5.18 U5.19 U5.20 U5.21 U5.22 U5.26 U5.30 U5.31 U5.32 U6.9 U6.10 U6.11 U6.12 U6.15 U7.7 U7.8 U7.9 U7.11

## Polygon pours and split planes (outlines as drawn)
3.3V on Bottom Layer "NONET_L02_P-001" (solid, pour order 2): 18.122,56.834 18.122,47.436 14.566,47.436 14.566,56.834
+VBAT on Bottom Layer "+VBAT_L04_P000" (solid, remove dead copper, pour order 0): 7.454,57.596 9.74,57.596 9.74,59.882 15.582,59.882 15.582,58.104 17.614,58.104 17.614,62.676 13.296,62.676 13.296,66.74 9.486,66.74 9.486,64.454 9.486,60.898 7.454,60.898
GND on Ground "NONET_L02_P-001" (solid, remove dead copper, pour order 1): 0.85,8.117 8.191,8.117 8.191,0.7 51.396,0.7 51.396,8.574 59.27,8.574 59.27,63.438 51.396,63.438 51.396,72.582 59.27,72.582 59.27,79.186 8.47,79.186 8.47,71.312 0.85,71.312
3.3V on Power "NONET_L02_P-001" (solid, pour order 3): 58.508,8.574 48.856,8.574 48.856,1.462 8.47,1.462 8.47,63.692 58.508,63.692 8.47,63.692 58.508,63.692

## Silkscreen, mask and mechanical layers (free items; w line width, h text height)
Mechanical 1:
  the board outline again, w0.254
Mechanical 12:
  lines w0.254: 8.47,1.462 8.47,63.692 58.508,63.692 58.508,8.574 48.856,8.574 48.856,1.462 8.47,1.462